# EAGLE board NMPaviIMU (EAGLE 9.6.2)
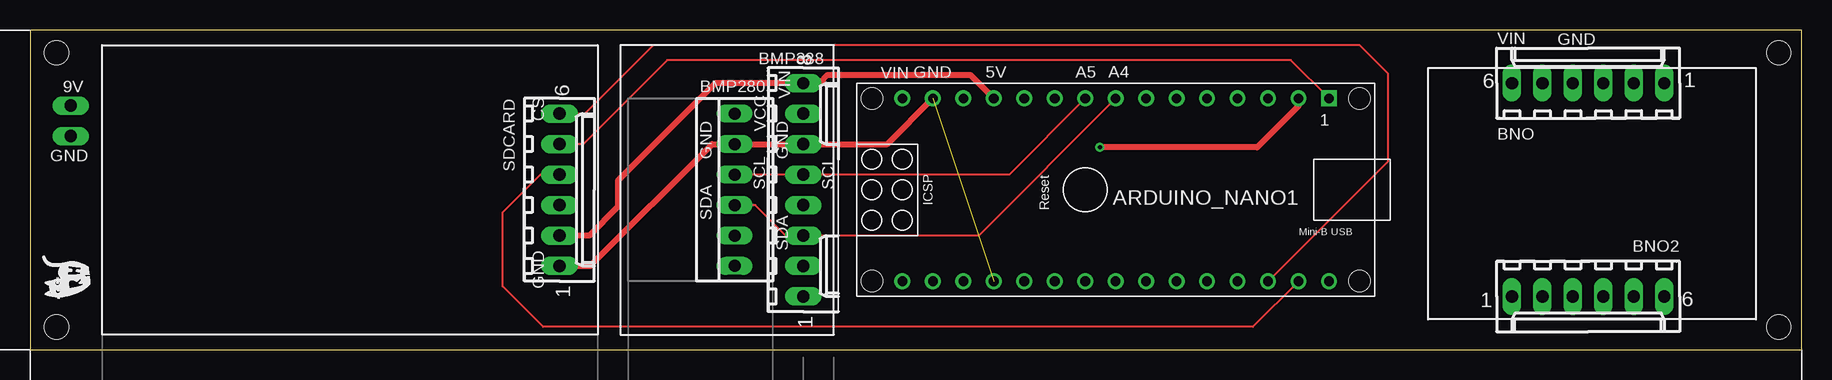
[diagram p0: board, top side]
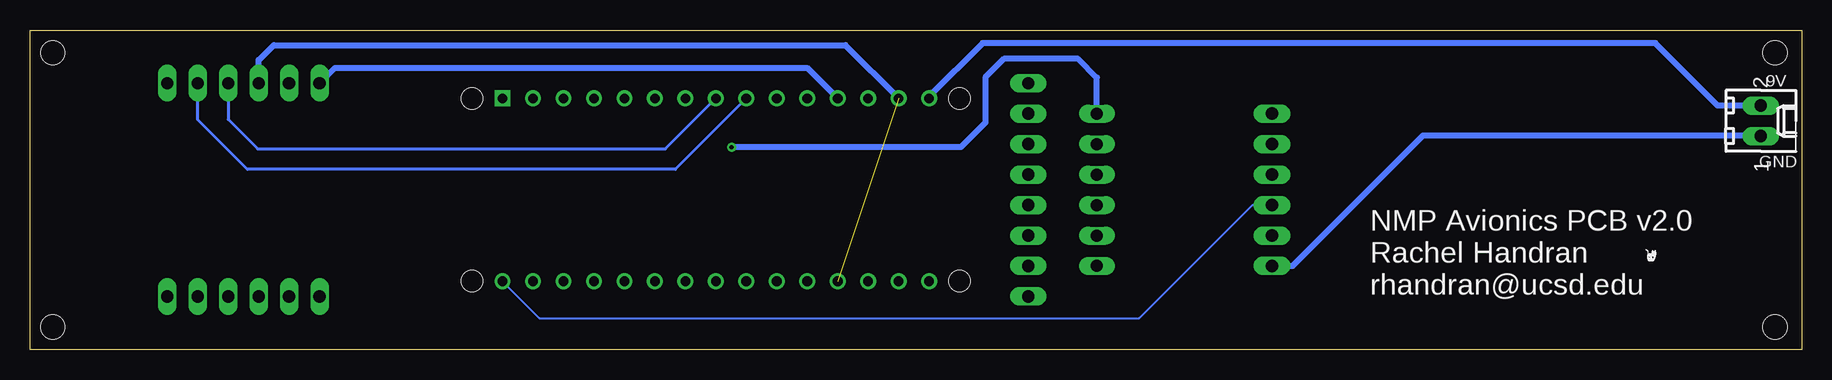
[diagram p1: board, bottom side, seen from below]

Size 147.62 x 26.65 mm. Coordinates in mm from the lower left corner, seen from the top.
Outline: 147.62,0 147.62,26.65 0,26.65 0,0 147.62,0
Copper layers (1*16): Top 0.035mm / dielectric 1.5mm / Bottom 0.035mm
Design rules "default *": minimum track width 6mil, minimum drill 0.35mm, track to track 6mil, track to pad 6mil, pad to pad 6mil, via to via 6mil, smd to smd 6mil, copper to edge 30mil, drill to drill 6mil, minimum pad ring 10mil, minimum via ring 8mil, stop-mask expansion 4mil, vias tented up to drill 0mil, thermal gap 10mil
Holes 2 mm at 145.72,1.91 145.72,24.77 2.21,1.91 2.21,24.77

## Footprints (pad centres in the part's own frame; a part is rotated, then mirrored left to right if it is on the bottom)
ARDUINO_NANO = drill 0.8 square: 1 -20.32,-7.62 | drill 0.8: 2 -17.78,-7.62; 3 -15.24,-7.62; 4 -12.7,-7.62; 5 -10.16,-7.62; 6 -7.62,-7.62; 7 -5.08,-7.62; 8 -2.54,-7.62; 9 0,-7.62; 10 2.54,-7.62; 11 5.08,-7.62; 12 7.62,-7.62; 13 10.16,-7.62; 14 12.7,-7.62; 15 15.24,-7.62; 16 15.24,7.62; 17 12.7,7.62; 18 10.16,7.62; 19 7.62,7.62; 20 5.08,7.62; 21 2.54,7.62; 22 0,7.62; 23 -2.54,7.62; 24 -5.08,7.62; 25 -7.62,7.62; 26 -10.16,7.62; 27 -12.7,7.62; 28 -15.24,7.62; 29 -17.78,7.62; 30 -20.32,7.62 | hole 1.778: -22.86,-7.62; -22.86,7.62; 17.78,7.62; 17.78,-7.62
6410-02 = drill 1.016 long: 1 1.27,0; 2 -1.27,0
22-23-2061 = drill 1 long: 1 -6.35,0; 2 -3.81,0; 3 -1.27,0; 4 1.27,0; 5 3.81,0; 6 6.35,0
6410-08 = drill 1.016 long: 1 8.89,0; 2 6.35,0; 3 3.81,0; 4 1.27,0; 5 -1.27,0; 6 -3.81,0; 7 -6.35,0; 8 -8.89,0
6410-06 = drill 1.016 long: 1 6.35,0; 2 3.81,0; 3 1.27,0; 4 -1.27,0; 5 -3.81,0; 6 -6.35,0

## Placement (x,y rotation side)
ARDUINO_NANO1  [ARDUINO_NANO]  87.93,13.33 180 top
BATTERY  22-27-2021-02  [6410-02]  3.39,19.09 270 bottom
BMP280  [22-23-2061]  58.73,13.33 90 top
BMP388  22-27-2081-08  [6410-08]  64.44,13.33 270 top
BNO  22-27-2061-06  [6410-06]  129.84,22.22 0 top
BNO2  22-27-2061-06  [6410-06]  129.84,4.45 180 top
SDCARD  22-27-2061-06  [6410-06]  44.12,13.33 270 top

## Library data of the parts
ARDUINO_NANO1 = ArduinoNanoV30
BATTERY BMP388 BNO BNO2 SDCARD = con-molex; MF: MOLEX; OC_FARNELL: unknown; OC_NEWARK: unknown
BMP280 = con-molex@1; MF: MOLEX; MPN: 22-23-2061; OC_FARNELL: 1462922; OC_NEWARK: 27C1933

## Nets
3V3: ARDUINO_NANO1.2 BMP280.6
5V: ARDUINO_NANO1.12 BMP388.8 BNO.6 SDCARD.2
9V: ARDUINO_NANO1.15 BATTERY.2
CS: ARDUINO_NANO1.28 SDCARD.6
GND: ARDUINO_NANO1.14 ARDUINO_NANO1.19 BATTERY.1 BMP280.5 BMP388.6 BNO.4 SDCARD.1
MOSI: ARDUINO_NANO1.29 SDCARD.4
MOSO: ARDUINO_NANO1.30 SDCARD.3
SCK: ARDUINO_NANO1.1 SDCARD.5
SCL: ARDUINO_NANO1.9 BMP280.4 BMP388.5 BNO.2
SDA: ARDUINO_NANO1.8 BMP280.3 BMP388.3 BNO.3

## Tracks (layer width: path | path; a pad name or v marks a point on that pad's centre or on a via)
3V3  (via drill 0.35)
  Top 0.508: v89.16,16.88 102.26,16.88 105.71,20.33 ARDUINO_NANO1.2
  Bottom 0.508: BMP280.6 58.73,22.69 60.28,24.24 66.48,24.24 68.01,22.71 68.01,18.92 70.04,16.89 89.15,16.89 v89.16,16.88
5V
  Top 0.508: ARDUINO_NANO1.12 78.37,22.9 66.48,22.9 65.81,22.22 BMP388.8 57.11,22.22 54.57,19.68 53.17,18.28 49,14.11 49,11.92 46.6,9.53 SDCARD.2
  Bottom 0.508: BNO.6 122.23,23.5 82.86,23.5 ARDUINO_NANO1.12
9V
  Bottom 0.508: BATTERY.2 6.98,20.36 12.19,25.56 68.24,25.56 72.7,21.11 ARDUINO_NANO1.15
CS
  Top 0.152: ARDUINO_NANO1.28 103.18,5.72 113.18,15.71 113.18,23.02 110.8,25.4 51.94,25.4 46.23,19.69 SDCARD.6
GND  (1 unrouted)
  Top 0.508: SDCARD.1 46.69,6.98 56.85,17.14 BMP280.5 BMP388.6 71.42,17.14 ARDUINO_NANO1.14
  Bottom 0.508: BATTERY.1 3.44,17.87 31.53,17.87 42.41,6.98 SDCARD.1 | BNO.4 128.57,24.13 127.3,25.4 79.68,25.4 ARDUINO_NANO1.14
MOSI
  Top 0.152: ARDUINO_NANO1.29 101.9,1.91 42.75,1.91 39.38,5.29 39.38,11.45 42.53,14.61 SDCARD.4
MOSO
  Bottom 0.152: ARDUINO_NANO1.30 105.17,2.63 55.19,2.63 45.76,12.06 SDCARD.3
SCK
  Top 0.152: ARDUINO_NANO1.1 105.08,24.13 53.1,24.13 46.12,17.14 SDCARD.5
SCL
  Top 0.152: ARDUINO_NANO1.9 81.58,14.61 BMP388.5 BMP280.4
  Bottom 0.254: ARDUINO_NANO1.9 93.85,15.04 129.51,15.04 133.65,19.19 BNO.2
SDA
  Top 0.152: ARDUINO_NANO1.8 79.05,9.53 BMP388.3 62.98,9.53 60.44,12.06 BMP280.3
  Bottom 0.254: BNO.3 131.12,19.2 128.66,16.75 94.68,16.75 ARDUINO_NANO1.8

## Text on the board
tPlace: VIN | GND | VIN | GND | 5V | A5 | A4 | 9V | VIN | CS | VCC | GND | GND | GND | SCL | SCL | SDA | SDA | GND | C:/Users/rache/Downloads/pcbLogoMono.bmp
bPlace: 9V | GND | NMP Avionics PCB v2.0 / Rachel Handran / rhandran@ucsd.edu